# Altium PCB BEAGLEPLAYV020_220915.brd.PcbDoc (part 2 of 12)
Units mil, origin at the board's own origin, x right, y up, seen from the top; angles counter-clockwise.
Board outline 3149.7 x 3149.7 mil, 8 copper layers (TOP, LYR2_GND, LYR3, LAY4_PWR1, LAY5_PWR2, LAY6, LYR7_GND, BOTTOM), stack 60.84 mil thick; 782 components, 546 nets, 2864 pads, 2056 vias.
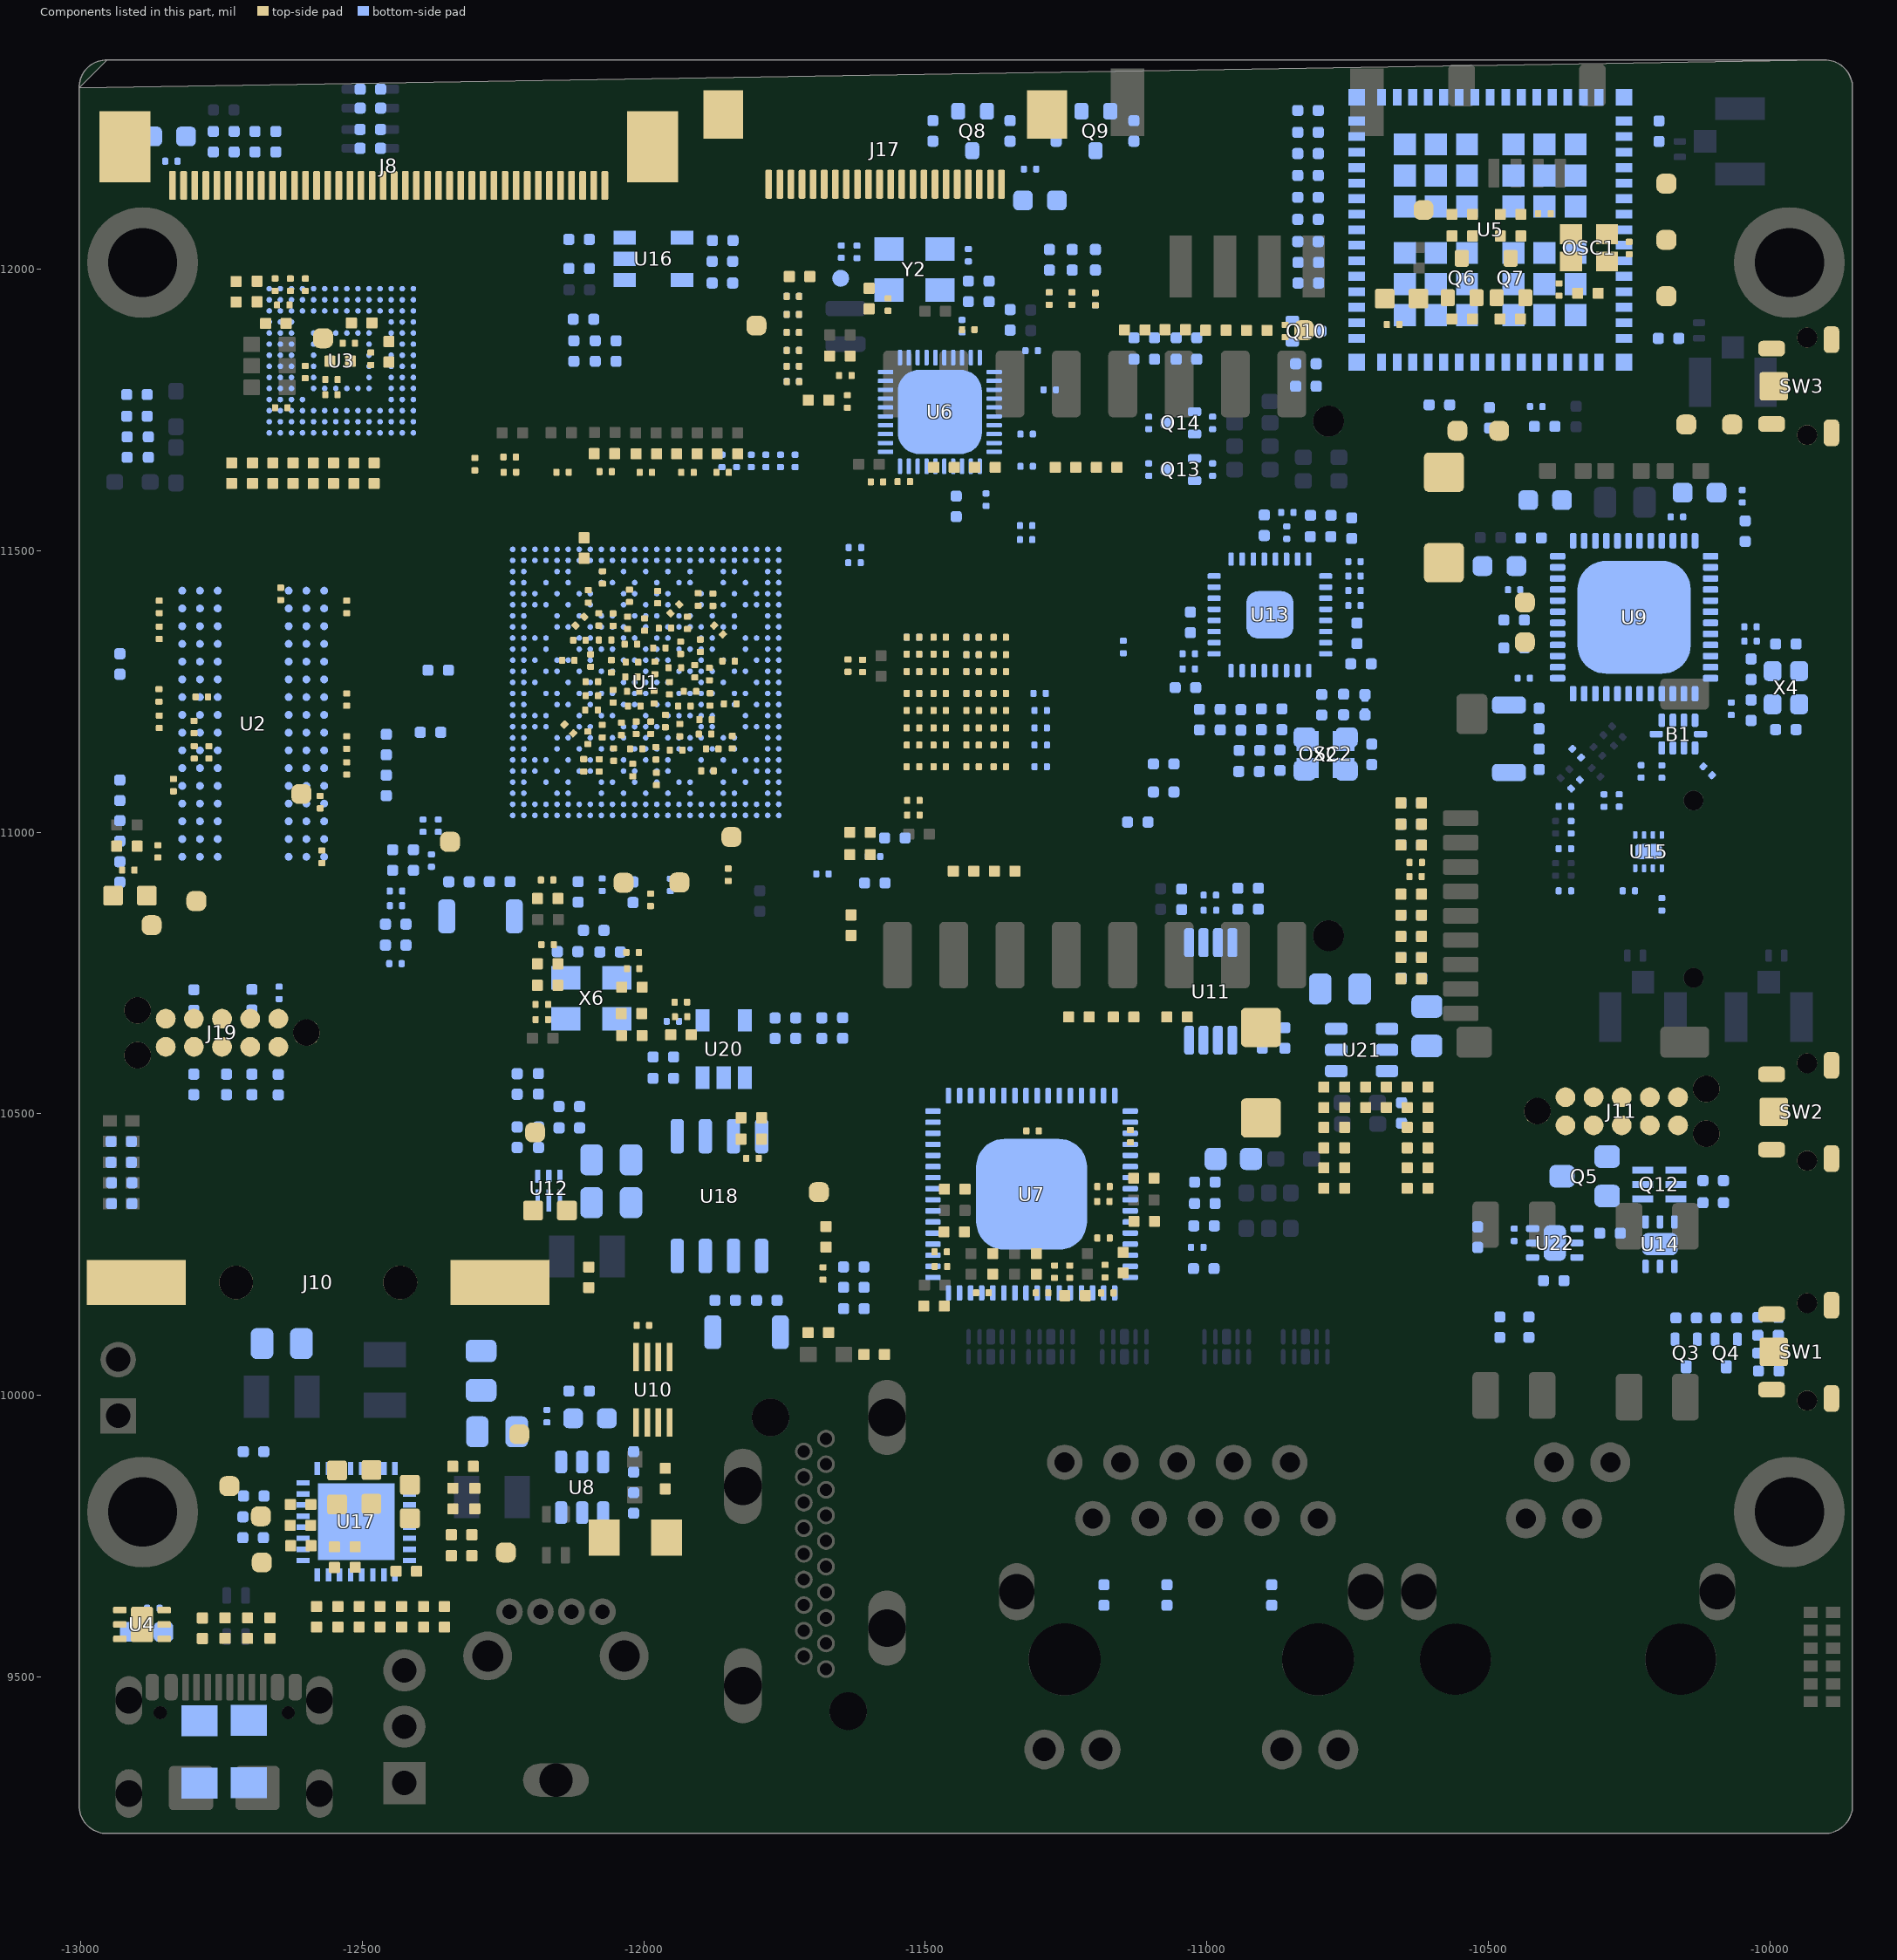
[diagram p8: the components of this part, seen from the top]

## Components (designator, comment, footprint, x,y, rotation, side; value= is the part's Value field where it differs from the comment) (continued)
OSC2 "OSC_4P_X4_SMD_2_5X2_0MM_DISCRETE_50MHZ" X4_SMD_2_5X2_0MM -10789,11141.5 r180 bottom
Q3 "NMOS_123_SOT_523_DISCRETE_DMG1012T-7" SOT_523#1 -10148.66,10075.28 r180 bottom
Q4 "NMOS_123_SOT_523_DISCRETE_DMG1012T-7" SOT_523#1 -10077.44,10075.28 r180 bottom
Q5 "PMOS_123_SOT23_DISCRETE_CJ3407" SOT23 -10331.5,10389.09 r90 bottom
Q6 "NMOS_123_SOT-323-3_DISCRETE_BSS138W" SOT-323-3#1 -10547.15,11984.2 r0 top
Q7 "NMOS_123_SOT-323-3_DISCRETE_BSS138W" SOT-323-3#1 -10460.5,11984.2 r0 top
Q8 "NMOS_123_SOT-323-3_DISCRETE_BSS138W" SOT-323-3#2 -11416.66,12245.34 r0 bottom
Q9 "NMOS_123_SOT-323-3_DISCRETE_BSS138W" SOT-323-3#2 -11197.66,12245.34 r0 bottom
Q10 "NMOS_123_SOT_523_DISCRETE_DMG1012T-7" SOT_523#2 -10823.7,11890 r90 bottom
Q12 "PNPX2_126_453_SMINI6-F3-B_DISCRETE_BCM857BS-7-F" SMINI6-F3-B -10196.54,10374.5 r270 bottom
Q13 "NMOS_123_SOT_523_DISCRETE_DMG1012T-7" SOT_523#2 -11046.15,11644 r270 bottom
Q14 "NMOS_123_SOT_523_DISCRETE_DMG1012T-7" SOT_523#2 -11046.15,11727 r270 bottom
R1 "R_R0402_DISCRETE_240R" R0402#1 -12930.44,11298.8 r270 bottom
R2 "R_R0201_DISCRETE_33R" R0201#1 -12772.3,11142 r90 top
R3 "R_R0201_DISCRETE_33R" R0201#1 -12798.3,11142 r90 top
R4 "R_R0402_DISCRETE_10K" R0402#1 -12930.44,10929.48 r270 bottom
R5 "R_R0402_DISCRETE_49.9K" R0402#2 -12478.86,11637.58 r90 top
R6 "R_R0402_DISCRETE_49.9K" R0402#2 -12514.86,11637.58 r90 top
R7 "R_R0402_DISCRETE_49.9K" R0402#2 -12586.86,11637.58 r90 top
R8 "R_R0402_DISCRETE_49.9K" R0402#2 -12694.86,11637.58 r90 top
R9 "R_R0402_DISCRETE_49.9K" R0402#2 -12731.86,11637.58 r90 top
R10 "R_R0402_DISCRETE_49.9K" R0402#2 -12550.86,11637.58 r90 top
R11 "R_R0402_DISCRETE_49.9K" R0402#2 -12622.86,11637.58 r90 top
R12 "R_R0402_DISCRETE_49.9K" R0402#2 -12658.86,11637.58 r90 top
R13 "R_R0402_DISCRETE_49.9K" R0402#2 -12724.14,11959.7 r270 top
R14 "R_R0402_DISCRETE_10K" R0402#2 -12653.36,11903.56 r0 top
R15 "R_R0402_DISCRETE_10K" R0402#2 -12539.12,11836.56 r0 top
R16 "R_R0201_DISCRETE_33R" R0201#1 -12300,11653.7 r90 top
R17 "R_R0402_DISCRETE_10K" R0402#3 -10819.79,11975.3 r180 bottom
R18 "R_R0402_DISCRETE_10K" R0402#3 -10820.3,12049 r180 bottom
R19 "R_R0402_DISCRETE_10K" R0402#3 -10587,11759 r180 bottom
R20 "R_R0402_DISCRETE_49.9K" R0402#2 -12500.96,11904.56 r0 top
R21 "R_R0402_DISCRETE_10K" R0402#3 -10636.42,10740.96 r0 bottom
R22 "R_R0402_DISCRETE_49.9K" R0402#3 -10820.3,12243.02 r180 bottom
R23 "R_R0402_DISCRETE_10K" R0402#3 -10820.3,12281.8 r0 bottom
R24 "R_R0402_DISCRETE_10K" R0402#3 -10820.3,12205.16 r0 bottom
R25 "R_R0402_DISCRETE_10K" R0402#3 -10820.3,12166.34 r0 bottom
R26 "R_R0402_DISCRETE_10K" R0402#3 -10820.3,12127.52 r0 bottom
R27 "R_R0402_DISCRETE_10K" R0402#3 -10820.3,12088.3 r0 bottom
R28 "R_R0402_DISCRETE_10K" R0402#1 -10498,11736 r90 bottom
R29 "R_R0402_DISCRETE_10K" R0402#3 -10824,11792 r180 bottom
R30 "R_R0402_DISCRETE_0R" R0402#2 -10323.2,11957 r180 top
R31 "R_R0201_DISCRETE_33R" R0201#1 -10374.5,11963.8 r270 top
R32 "R_R0402_DISCRETE_0R" R0402#2 -11723.21,11986.89 r0 top
R33 "R_R0402_DISCRETE_2.49K" R0402#1 -11349.33,11909.96 r270 bottom
R34 "R_R0402_DISCRETE_0R" R0402#1 -10884.86,9645.53 r90 bottom
R35 "R_R0402_DISCRETE_0R" R0402#1 -11279.5,12016.62 r270 bottom
R36 "R_R0201_DISCRETE_10K" R0201#2 -10989.85,11644 r90 bottom
R37 "R_R0201_DISCRETE_10K" R0201#2 -11103.15,11644 r90 bottom
R38 "R_R1206_DISCRETE_1M" R1206 -12788.86,9366.7 r90 bottom
R39 "R_R0402_DISCRETE_1K" R0402#1 -11182.7,9645.53 r90 bottom
R40 "R_R0402_DISCRETE_1K" R0402#1 -11239.13,12016.62 r270 bottom
R41 "R_R0201_DISCRETE_4.7K" R0201#3 -11735.14,11827.61 r0 bottom
R42 "R_R0201_DISCRETE_4.7K" R0201#1 -11735.14,11827.61 r180 top
R43 "R_R0201_DISCRETE_4.7K" R0201#3 -11735.14,11855.61 r0 bottom
R44 "R_R0201_DISCRETE_4.7K" R0201#1 -11735.14,11855.61 r180 top
R45 "R_R0201_DISCRETE_4.7K" R0201#3 -11735.14,11887.61 r0 bottom
R46 "R_R0201_DISCRETE_4.7K" R0201#1 -11735.14,11887.61 r180 top
R47 "R_R0201_DISCRETE_4.7K" R0201#3 -11735.14,11800.61 r0 bottom
R48 "R_R0201_DISCRETE_4.7K" R0201#1 -11735,11800 r180 top
R49 "R_R0201_DISCRETE_33R" R0201#2 -11809.14,11659.46 r270 bottom
R50 "R_R0201_DISCRETE_33R" R0201#2 -11783.14,11659.46 r270 bottom
R51 "R_R0201_DISCRETE_33R" R0201#2 -11757.14,11659.46 r270 bottom
R52 "R_R0201_DISCRETE_33R" R0201#2 -11731.14,11659.46 r270 bottom
R53 "R_R0402_DISCRETE_1K" R0402#3 -12900.08,11777.2 r0 bottom
R54 "R_R0402_DISCRETE_10K" R0402#2 -12468.5,9606.92 r90 top
R55 "R_R0402_DISCRETE_100K" R0402#2 -12505.5,9606.92 r270 top
R56 "R_R0402_DISCRETE_49.9K" R0402#3 -10100.74,10381.5 r0 bottom
R57 "R_R0201_DISCRETE_33R" R0201#2 -11861.14,11659.46 r270 bottom
R58 "R_R0201_DISCRETE_33R" R0201#2 -11835.14,11659.46 r270 bottom
R59 "R_R0402_DISCRETE_49.9K" R0402#3 -10100.74,10342.2 r0 bottom
R60 "R_R0402_DISCRETE_10K" R0402#1 -10654.2,10501.54 r90 bottom
R61 "R_R0201_DISCRETE_4.7K" R0201#3 -11735.14,11951.61 r0 bottom
R62 "R_R0201_DISCRETE_4.7K" R0201#1 -11735.14,11951.61 r180 top
R63 "R_R0402_DISCRETE_49.9K" R0402#2 -11690,10111.34 r180 top
R64 "R_R0402_DISCRETE_2.2K" R0402#3 -11003.6,10378.86 r180 bottom
R65 "R_R0402_DISCRETE_2.2K" R0402#3 -11003.64,10340.86 r180 bottom
R66 "R_R0402_DISCRETE_33K" R0402#3 -11005.48,10225.14 r0 bottom
R67 "R_R0402_DISCRETE_1K" R0402#3 -10926.62,10900.56 r180 bottom
R68 "R_R0402_DISCRETE_1K" R0402#1 -10861.44,10634.64 r270 bottom
R69 "R_R0201_DISCRETE_33R" R0201#3 -11295,11216.26 r0 bottom
R70 "R_R0402_DISCRETE_10K" R0402#2 -11961.86,9852.2 r90 top
R71 "R_R0201_DISCRETE_33R" R0201#2 -11148.44,11329 r90 bottom
R72 "R_R0201_DISCRETE_33R" R0201#3 -11295,11154.86 r0 bottom
R73 "R_R0402_DISCRETE_10K" R0402#3 -10637,10777.74 r0 bottom
R74 "R_R0402_DISCRETE_10K" R0402#3 -10637,10815.04 r0 bottom
R75 "R_R0402_DISCRETE_10K" R0402#3 -10637,10852.76 r0 bottom
R76 "R_R0402_DISCRETE_10K" R0402#3 -10637,11014.28 r0 bottom
R77 "R_R0402_DISCRETE_10K" R0402#3 -10637,11052.04 r0 bottom
R78 "R_R0402_DISCRETE_10K" R0402#3 -10637,10977.14 r0 bottom
R79 "R_R0201_DISCRETE_33R" R0201#3 -11591,10956.95 r0 bottom
R80 "R_R0201_DISCRETE_33R" R0201#3 -11682.7,10926 r0 bottom
R81 "R_R0402_DISCRETE_1K" R0402#1 -12930.44,11074.6 r90 bottom
R82 "R_R0402_DISCRETE_10K" R0402#1 -12457.16,11083.2 r90 bottom
R83 "R_R0402_DISCRETE_1K" R0402#1 -12930.44,11002.56 r90 bottom
R84 "R_R0402_DISCRETE_2.2K" R0402#1 -12457.16,11155.72 r90 bottom
R85 "R_R0402_DISCRETE_2.2K" R0402#3 -12378.72,11177.56 r180 bottom
R86 "R_R0402_DISCRETE_1K" R0402#3 -12440.48,10799.56 r180 bottom
R87 "R_R0402_DISCRETE_1K" R0402#3 -12440.48,10836.84 r0 bottom
R88 "R_R0402_DISCRETE_240R" R0402#3 -12365.16,11287.84 r0 bottom
R89 "R_R0402_DISCRETE_5.6K" R0402#2 -11234,10177 r180 top
R90 "R_R0201_DISCRETE_10K" R0201#1 -11521.9,11346.3 r0 top
R91 "R_R0201_DISCRETE_10K" R0201#1 -11474.4,11346.3 r0 top
R92 "R_R0201_DISCRETE_10K" R0201#1 -11415.96,11346.1 r0 top
R93 "R_R0201_DISCRETE_10K" R0201#1 -11367.7,11346.1 r0 top
R94 "R_R0402_DISCRETE_10K" R0402#3 -12107,11911 r0 bottom
R95 "R_R0201_DISCRETE_33R" R0201#3 -11624.92,11505.56 r180 bottom
R96 "R_R0201_DISCRETE_33R" R0201#3 -11321,11544.56 r180 bottom
R97 "R_R0201_DISCRETE_33R" R0201#3 -11321,11519.56 r180 bottom
R98 "R_R0201_DISCRETE_33R" R0201#2 -10858.14,11532.04 r270 bottom
R99 "R_R0402_DISCRETE_0R" R0402#1 -10795.86,11226.4 r90 bottom
R100 "R_R0402_DISCRETE_49.9R" R0402#2 -10755.14,10529.44 r270 top
R101 "R_R0402_DISCRETE_49.9R" R0402#2 -10792.14,10529.32 r270 top
R102 "R_R0402_DISCRETE_2K" R0402#2 -10607.14,10529.44 r270 top
R103 "R_R0402_DISCRETE_2K" R0402#2 -10644.14,10529.44 r270 top
R104 "R_R0402_DISCRETE_0R" R0402#2 -10717.86,10529.44 r90 top
R105 "R_R0402_DISCRETE_0R" R0402#2 -10681.14,10529.44 r270 top
R106 "R_R0402_DISCRETE_0R" R0402#2 -10755.14,10386.12 r270 top
R107 "R_R0402_DISCRETE_0R" R0402#2 -10792.14,10386.12 r270 top
R108 "R_R0402_DISCRETE_0R" R0402#2 -10644.14,10386.12 r270 top
R109 "R_R0402_DISCRETE_0R" R0402#2 -10607.14,10386.12 r270 top
R110 "R_R0402_DISCRETE_2.2K" R0402#1 -11029.14,11372.64 r270 bottom
R111 "R_R0402_DISCRETE_2.2K" R0402#3 -10797.68,11562.86 r180 bottom
R112 "R_R0402_DISCRETE_2.2K" R0402#3 -10726.28,11299.14 r0 bottom
R113 "R_R0402_DISCRETE_2.2K" R0402#1 -10898,11545.21 r270 bottom
R114 "R_R0402_DISCRETE_2.2K" R0402#1 -11013.14,11200.2 r90 bottom
R115 "R_R0402_DISCRETE_2.2K" R0402#1 -10976.14,11200.16 r90 bottom
R116 "R_R0402_DISCRETE_2.2K" R0402#3 -10798,11525 r0 bottom
R117 "R_R0402_DISCRETE_100K" R0402#1 -10043.84,11534.68 r270 bottom
R118 "R_R0402_DISCRETE_1M" R0402#1 -10033.44,11289.54 r270 bottom
R119 "R_R0402_DISCRETE_0R" R0402#1 -10033.44,11216.78 r90 bottom
R120 "R_R0402_DISCRETE_0R" R0402#3 -10454.22,11327.28 r0 bottom
R121 "R_R0402_DISCRETE_0R" R0402#3 -10454.26,11376.84 r0 bottom
R122 "R_R0402_DISCRETE_10K" R0402#2 -11616,10960.21 r180 top
R123 "R_R0402_DISCRETE_0R" R0402#2 -12300,9817 r90 top
R124 "R_R0402_DISCRETE_15K" R0402#2 -12339,9817 r270 top
R125 "R_R0402_DISCRETE_10K" R0402#3 -11036.21,11878 r0 bottom
R126 "R_R0402_DISCRETE_10K" R0402#1 -12019.14,10893.58 r270 bottom
R127 "R_R0402_DISCRETE_0R" R0402#3 -12088.92,10825.84 r0 bottom
R128 "R_R0402_DISCRETE_5.1K" R0402#2 -12663.86,9586.92 r90 top
R129 "R_R0402_DISCRETE_5.1K" R0402#2 -12783.86,9586.52 r90 top
R130 "R_R0402_DISCRETE_499R" R0402#2 -12106,11504.7 r90 top
R131 "R_R0402_DISCRETE_499R" R0402#1 -12124.14,11854.62 r270 bottom
R132 "R_R0402_DISCRETE_20K" R0402#1 -12049.14,11854.62 r270 bottom
R133 "R_R0402_DISCRETE_1K" R0402#3 -12114.8,10007.86 r180 bottom
R134 "R_R0402_DISCRETE_10K" R0402#1 -11646.84,10652.54 r270 bottom
R135 "R_R0402_DISCRETE_0R" R0402#3 -11122.64,11018.04 r0 bottom
R136 "R_R0402_DISCRETE_20K" R0402#1 -12018,9809 r90 bottom
R137 "R_R0402_DISCRETE_10K" R0402#1 -12224.86,10458.44 r90 bottom
R138 "R_R0402_DISCRETE_10K" R0402#1 -12186.86,10458.4 r90 bottom
R139 "R_R0402_DISCRETE_100K" R0402#1 -12187.14,10553.3 r270 bottom
R140 "R_R0402_DISCRETE_10K" R0402#2 -10911.38,11891.44 r180 top
R141 "R_R0402_DISCRETE_11K" R0402#1 -12224.86,10553.02 r90 bottom
R142 "R_R0402_DISCRETE_10K" R0402#2 -11127.98,11892.16 r0 top
R143 "R_R0402_DISCRETE_10K" R0402#3 -11965.24,10563.14 r0 bottom
R144 "R_R0402_DISCRETE_10K" R0402#3 -11965.2,10601.14 r0 bottom
R145 "R_R0201_DISCRETE_33R" R0201#3 -11625.76,11478.56 r180 bottom
R146 "R_R0402_DISCRETE_10K" R0402#3 -11627.08,10228.14 r0 bottom
R147 "R_R0402_DISCRETE_10K" R0402#3 -11626.96,10191.86 r180 bottom
R148 "R_R0402_DISCRETE_10K" R0402#1 -11683.84,10652.22 r270 bottom
R149 "R_R0402_DISCRETE_0R" R0402#2 -11616,10999.95 r0 top
R150 "R_R0402_DISCRETE_10K" R0402#3 -11005,10301 r180 bottom
R151 "R_R0402_DISCRETE_10K" R0402#1 -12741.14,10552.24 r270 bottom
R152 "R_R0402_DISCRETE_10K" R0402#1 -12018,9882 r270 bottom
R153 "R_R0402_DISCRETE_499R" R0402#1 -12086.14,11854.62 r270 bottom
R154 "R_R0402_DISCRETE_10K" R0402#1 -12798.86,10702.22 r90 bottom
R155 "R_R0402_DISCRETE_10K" R0402#1 -12695.86,10702.58 r90 bottom
R156 "R_R0402_DISCRETE_10K" R0402#1 -12649.14,10551.76 r270 bottom
R157 "R_R0402_DISCRETE_10K" R0402#1 -12799.14,10552.24 r270 bottom
R158 "R_R0402_DISCRETE_10K" R0402#1 -12695.86,10552.24 r90 bottom
R159 "R_R0402_DISCRETE_10K" R0402#2 -12609,9733 r180 top
R160 "R_R0402_DISCRETE_10K" R0402#2 -12430,9607 r90 top
R161 "R_R0402_DISCRETE_10K" R0402#3 -12693,9900 r0 bottom
R162 "R_R0402_DISCRETE_10K" R0402#2 -11809,10455 r180 top
R163 "R_R0402_DISCRETE_0R" R0402#2 -11809,10493 r180 top
R164 "R_R0402_DISCRETE_1K" R0402#1 -11070.86,9645.53 r90 bottom
R165 "R_R0402_DISCRETE_1K" R0402#1 -11197.93,12016.62 r270 bottom
R166 "R_R0402_DISCRETE_2.2K" R0402#3 -10148.66,10137.61 r180 bottom
R167 "R_R0402_DISCRETE_2.2K" R0402#3 -10077.44,10137.61 r180 bottom
R168 "R_R0402_DISCRETE_10K" R0402#1 -12879.84,11683.92 r270 bottom
R169 "R_R0402_DISCRETE_10K" R0402#1 -11267.56,12245.34 r90 bottom
R170 "R_R0201_DISCRETE_10K" R0201#1 -11415.96,11315.3 r0 top
R171 "R_R0201_DISCRETE_10K" R0201#1 -11521.9,11316.3 r0 top
R172 "R_R0201_DISCRETE_10K" R0201#1 -11521.9,11285.3 r0 top
R173 "R_R0201_DISCRETE_10K" R0201#1 -11415.96,11285.3 r0 top
R174 "R_R0201_DISCRETE_10K" R0201#1 -11521.9,11246.64 r0 top
R175 "R_R0201_DISCRETE_10K" R0201#1 -11415.96,11246.64 r0 top
R176 "R_R0201_DISCRETE_10K" R0201#1 -11521.9,11185.26 r0 top
R177 "R_R0201_DISCRETE_10K" R0201#1 -11521.9,11154.86 r0 top
R178 "R_R0201_DISCRETE_10K" R0201#1 -11521.9,11216.26 r0 top
R179 "R_R0201_DISCRETE_10K" R0201#1 -11415.96,11216.26 r0 top
R180 "R_R0201_DISCRETE_10K" R0201#1 -11415.96,11154.86 r0 top
R181 "R_R0201_DISCRETE_10K" R0201#1 -11415.96,11185.26 r0 top
R182 "R_R0201_DISCRETE_10K" R0201#1 -11521.9,11116.36 r0 top
R183 "R_R0201_DISCRETE_10K" R0201#1 -11415.96,11116.36 r0 top
R184 "R_R0402_DISCRETE_1K" R0402#1 -12917.56,11683.92 r90 bottom
R185 "R_R0402_DISCRETE_1K" R0402#3 -12900.08,11738.84 r0 bottom
R186 "R_R0402_DISCRETE_10K" R0402#2 -10546.34,11911.56 r0 top
R187 "R_R0201_DISCRETE_10K" R0201#1 -11367.7,11315.3 r0 top
R188 "R_R0201_DISCRETE_10K" R0201#1 -11474.4,11316.3 r0 top
R189 "R_R0201_DISCRETE_10K" R0201#1 -11474.4,11285.3 r0 top
R190 "R_R0201_DISCRETE_10K" R0201#1 -11367.7,11285.3 r0 top
R191 "R_R0201_DISCRETE_10K" R0201#1 -11474.4,11246.64 r0 top
R192 "R_R0201_DISCRETE_10K" R0201#1 -11367.7,11246.64 r0 top
R193 "R_R0201_DISCRETE_10K" R0201#1 -11474.4,11185.26 r0 top
R194 "R_R0201_DISCRETE_10K" R0201#1 -11474.4,11154.86 r0 top
R195 "R_R0201_DISCRETE_10K" R0201#1 -11474.4,11216.26 r0 top
R196 "R_R0201_DISCRETE_10K" R0201#1 -11367.7,11216.26 r0 top
R197 "R_R0201_DISCRETE_10K" R0201#1 -11367.7,11154.86 r0 top
R198 "R_R0201_DISCRETE_10K" R0201#1 -11367.7,11185.26 r0 top
R199 "R_R0201_DISCRETE_10K" R0201#1 -11474.4,11116.36 r0 top
R200 "R_R0201_DISCRETE_10K" R0201#1 -11367.7,11116.36 r0 top
R201 "R_R0402_DISCRETE_1K" R0402#3 -11554,10989.95 r0 bottom
R202 "R_R0402_DISCRETE_1K" R0402#3 -12928.04,10450.86 r180 bottom
R203 "R_R0402_DISCRETE_1K" R0402#3 -12928.08,10413.86 r180 bottom
R204 "R_R0402_DISCRETE_1K" R0402#3 -12927.12,10377.56 r180 bottom
R205 "R_R0402_DISCRETE_1K" R0402#3 -12927.16,10340.56 r180 bottom
R206 "R_R0402_DISCRETE_1K" R0402#3 -10002.21,10043.5 r0 bottom
R207 "R_R0402_DISCRETE_10K" R0402#3 -10384,10203.84 r0 bottom
R208 "R_R0402_DISCRETE_10K" R0402#3 -11111.21,11878 r180 bottom
R209 "R_R0402_DISCRETE_10K" R0402#1 -11730.14,10652.2 r270 bottom
R210 "R_R0402_DISCRETE_10K" R0402#3 -12114.94,12052.84 r0 bottom
R211 "R_R0402_DISCRETE_100K" R0402#3 -11860.36,12013.84 r0 bottom
R212 "R_R0402_DISCRETE_120K" R0402#3 -11859.76,12050.84 r0 bottom
R213 "R_R0402_DISCRETE_10K" R0402#1 -11766.86,10652 r90 bottom
R214 "R_R0402_DISCRETE_10K" R0402#2 -12543.14,9606.92 r270 top
R215 "R_R0402_DISCRETE_10K" R0402#2 -12581.14,9606.88 r270 top
R216 "R_R0201_DISCRETE_33R" R0201#3 -11415.96,11285.3 r180 bottom
R217 "R_R0201_DISCRETE_33R" R0201#2 -12073.86,10906.82 r90 bottom
R218 "R_R0402_DISCRETE_10K" R0402#3 -10819.79,12011.94 r180 bottom
R219 "R_R0402_DISCRETE_0R" R0402#3 -12485.62,12214.57 r180 bottom
R220 "R_R0402_DISCRETE_0R" R0402#1 -10719.14,11226.32 r270 bottom
R221 "R_R0402_DISCRETE_0R" R0402#1 -10757.14,11226.9 r270 bottom
R222 "R_R0402_DISCRETE_0R" R0402#1 -10707.14,11138.4 r270 bottom
R223 "R_R0402_DISCRETE_0R" R0402#1 -10939.5,11199.56 r90 bottom
R224 "R_R0402_DISCRETE_33R" R0402#3 -10885.08,11182.14 r0 bottom
R225 "R_R0402_DISCRETE_0R" R0402#3 -12485.62,12248.03 r180 bottom
R226 "R_R0402_DISCRETE_10K" R0402#2 -10461.1,11911.56 r0 top
R227 "R_R0402_DISCRETE_0R" R0402#1 -12116.5,10894.06 r90 bottom
R228 "R_R0402_DISCRETE_10K" R0402#2 -12321,9874 r180 top
R229 "R_R0402_DISCRETE_0R" R0402#1 -11386.73,11960.38 r270 bottom
R230 "R_R0201_DISCRETE_33R" R0201#3 -11415.96,11346.1 r180 bottom
R231 "R_R0402_DISCRETE_0R" R0402#3 -10924.44,11145.5 r180 bottom
R232 "R_R0402_DISCRETE_10K" R0402#1 -11349.5,12245.34 r270 bottom
R233 "R_R0402_DISCRETE_10K" R0402#1 -11129.5,12245.34 r270 bottom
R234 "R_R0402_DISCRETE_10K" R0402#3 -11076.64,11071.5 r180 bottom
R235 "R_R0402_DISCRETE_10K" R0402#3 -11076.64,11121.36 r180 bottom
R236 "R_R0402_DISCRETE_1K" R0402#3 -10003.21,10075.14 r0 bottom
R237 "R_R0402_DISCRETE_1K" R0402#3 -10003.21,10106.78 r0 bottom
R238 "R_R0402_DISCRETE_1K" R0402#3 -10003.21,10138.42 r0 bottom
R239 "R_R0402_DISCRETE_2.2K" R0402#3 -10824,11832 r180 bottom
R240 "R_R0402_DISCRETE_10K" R0402#1 -12690.5,12226.34 r270 bottom
R241 "R_R0402_DISCRETE_10K" R0402#1 -12653.5,12226.34 r270 bottom
R242 "R_R0402_DISCRETE_10K" R0402#1 -12727.5,12226.34 r270 bottom
R243 "R_R0402_DISCRETE_10K" R0402#1 -12764.5,12226.34 r270 bottom
R244 "R_R0201_DISCRETE_33R" R0201#2 -11952.8,10906.64 r270 bottom
R245 "R_R0201_DISCRETE_33R" R0201#3 -11295,11185.26 r0 bottom
R246 "R_R0201_DISCRETE_33R" R0201#3 -11297,11246.64 r0 bottom
R247 "R_R0201_DISCRETE_33R" R0201#3 -11295,11116.36 r0 bottom
R248 "R_R0402_DISCRETE_0R" R0402#1 -11423.53,11960.62 r90 bottom
R249 "R_R0201_DISCRETE_4.7K" R0201#3 -11735.14,11919.61 r0 bottom
R250 "R_R0402_DISCRETE_10K" R0402#1 -11486.5,12245.34 r90 bottom
R251 "R_R0402_DISCRETE_10K" R0402#3 -11589.7,10910 r0 bottom
R252 "R_R0201_DISCRETE_4.7K" R0201#1 -11735.14,11919.61 r180 top
R253 "R_R0201_DISCRETE_4.7K" R0201#2 -11280,11947.81 r270 bottom
R254 "R_R0402_DISCRETE_10K" R0402#2 -10460.5,12058.86 r0 top
R255 "R_R0402_DISCRETE_10K" R0402#2 -10546.34,12058.86 r180 top
R256 "R_R0402_DISCRETE_10K" R0402#3 -11626.76,10154 r180 bottom
R257 "R_R0402_DISCRETE_2.2K" R0402#2 -11111.2,10309 r180 top
R258 "R_R0201_DISCRETE_33R" R0201#1 -11176.7,10182 r180 top
R259 "R_R0201_DISCRETE_10K" R0201#2 -10989.85,11727 r90 bottom
R260 "R_R0402_DISCRETE_560K" R0402#3 -12132.17,10475 r0 bottom
R261 "R_R0402_DISCRETE_124K" R0402#3 -12132.21,10513 r0 bottom
R262 "R_R0201_DISCRETE_10K" R0201#2 -11103.15,11727 r270 bottom
R263 "R_R0402_DISCRETE_2.2K" R0402#1 -11445,11578.75 r270 bottom
R264 "R_R0402_DISCRETE_0R" R0402#3 -12485.46,12319.44 r180 bottom
R265 "R_R0402_DISCRETE_0R" R0402#3 -12485.46,12285.98 r180 bottom
R266 "R_R0201_DISCRETE_33R" R0201#3 -11521.9,11285.3 r180 bottom
R267 "R_R0201_DISCRETE_33R" R0201#3 -11521.9,11316.3 r180 bottom
R268 "R_R0201_DISCRETE_33R" R0201#3 -11415.96,11315.3 r180 bottom
R269 "R_R0201_DISCRETE_33R" R0201#3 -11521.9,11346.3 r180 bottom
R270 "R_R0201_DISCRETE_33R" R0201#3 -11521.9,11246.64 r180 bottom
R271 "R_R0201_DISCRETE_33R" R0201#3 -11415.96,11246.64 r180 bottom
R272 "R_R0402_DISCRETE_12K" R0402#3 -10925,11108 r180 bottom
R273 "R_R0201_DISCRETE_33R" R0201#1 -11850.05,10924.58 r270 top
R274 "R_R0201_DISCRETE_33R" R0201#1 -11988,10880 r270 top
R275 "R_R0402_DISCRETE_10K" R0402#1 -10870.08,11128 r90 bottom
R276 "R_R0402_DISCRETE_390K" R0402#3 -10284,10288 r0 bottom
R277 "R_R0201_DISCRETE_0R" R0201#2 -11649,12031 r90 bottom
R278 "R_R0402_DISCRETE_100K" R0402#1 -10519,10281 r270 bottom
R283 "R_R0201_DISCRETE_4.7K" R0201#1 -11280,11947.81 r270 top
R308 "R_R0201_DISCRETE_4.7K" R0201#2 -11239.6,11947.81 r270 bottom
R309 "R_R0201_DISCRETE_4.7K" R0201#1 -11239.6,11947.81 r270 top
R310 "R_R0201_DISCRETE_4.7K" R0201#2 -11198,11946.81 r270 bottom
R311 "R_R0201_DISCRETE_4.7K" R0201#1 -11198,11946.81 r270 top
SW1 "TACTILE SWITCH_2+3P_BUTTON2_3P_4D55X2D3X1D88MM_DISCRETE_TS23M-BN-PT-PF" BUTTON2_3P_4D55X2D3X1D88MM -9929,10077.3 r270 top
SW2 "TACTILE SWITCH_2+3P_BUTTON2_3P_4D55X2D3X1D88MM_DISCRETE_TS23M-BN-PT-PF" BUTTON2_3P_4D55X2D3X1D88MM -9929,10503.3 r270 top
SW3 "TACTILE SWITCH_2+3P_BUTTON2_3P_4D55X2D3X1D88MM_DISCRETE_TS23M-BN-PT-PF" BUTTON2_3P_4D55X2D3X1D88MM -9929,11792 r270 top
TP1 "TEST POINT_TP35S_SMD_DISCRETE_TEST POINT" TP35S_SMD -12569.51,11877.14 r270 top
TP2 "TEST POINT_TP35S_SMD_DISCRETE_TEST POINT" TP35S_SMD -11844.21,10991.58 r90 top
TP3 "TEST POINT_TP35S_SMD_DISCRETE_TEST POINT" TP35S_SMD -12035.77,10910.39 r270 top
TP4 "TEST POINT_TP35S_SMD_DISCRETE_TEST POINT" TP35S_SMD -10555,11713 r180 top
TP5 "TEST POINT_TP35S_SMD_DISCRETE_TEST POINT" TP35S_SMD -10481,11713 r180 top
TP6 "TEST POINT_TP35S_SMD_DISCRETE_TEST POINT" TP35S_SMD -10615,12105 r0 top
TP7 "TEST POINT_TP35S_SMD_DISCRETE_TEST POINT" TP35S_SMD -10183.83,12151.89 r0 top
TP8 "TEST POINT_TP30C_SMD_DISCRETE_TEST POINT" TP30C_SMD -11650.32,11983.65 r180 bottom
TP9 "TEST POINT_TP35S_SMD_DISCRETE_TEST POINT" TP35S_SMD -10183.83,11951.89 r0 top
TP10 "TEST POINT_TP35S_SMD_DISCRETE_TEST POINT" TP35S_SMD -10183.83,12051.89 r0 top
TP11 "TEST POINT_TP35S_SMD_DISCRETE_TEST POINT" TP35S_SMD -12794.55,10877.84 r90 top
TP12 "TEST POINT_TP35S_SMD_DISCRETE_TEST POINT" TP35S_SMD -10435.19,11337.51 r90 top
TP13 "TEST POINT_TP35S_SMD_DISCRETE_TEST POINT" TP35S_SMD -12608,11068 r90 top
TP14 "TEST POINT_TP35S_SMD_DISCRETE_TEST POINT" TP35S_SMD -10435.19,11408.07 r270 top
TP15 "TEST POINT_TP35S_SMD_DISCRETE_TEST POINT" TP35S_SMD -12344,10983 r90 top
TP16 "TEST POINT_TP35S_SMD_DISCRETE_TEST POINT" TP35S_SMD -11936.55,10910.95 r90 top
TP17 "TEST POINT_TP35S_SMD_DISCRETE_TEST POINT" TP35S_SMD -10067.19,11724.11 r180 top
TP18 "TEST POINT_TP35S_SMD_DISCRETE_TEST POINT" TP35S_SMD -12221,9931 r90 top
TP19 "TEST POINT_TP35S_SMD_DISCRETE_TEST POINT" TP35S_SMD -12193,10467 r270 top
TP20 "TEST POINT_TP35S_SMD_DISCRETE_TEST POINT" TP35S_SMD -11689,10361 r0 top
TP21 "TEST POINT_TP35S_SMD_DISCRETE_TEST POINT" TP35S_SMD -12874,10835 r90 top
TP22 "TEST POINT_TP35S_SMD_DISCRETE_TEST POINT" TP35S_SMD -12245,9721 r90 top
TP23 "TEST POINT_TP35S_SMD_DISCRETE_TEST POINT" TP35S_SMD -12678.34,9703.31 r90 top
TP24 "TEST POINT_TP35S_SMD_DISCRETE_TEST POINT" TP35S_SMD -12679.97,9785.31 r90 top
TP25 "TEST POINT_TP35S_SMD_DISCRETE_TEST POINT" TP35S_SMD -12736,9839 r90 top
TP26 "TEST POINT_TP35S_SMD_DISCRETE_TEST POINT" TP35S_SMD -10827.21,11891.69 r0 top
TP27 "TEST POINT_TP35S_SMD_DISCRETE_TEST POINT" TP35S_SMD -11799.82,11899.69 r0 top
TP28 "TEST POINT_TP35S_SMD_DISCRETE_TEST POINT" TP35S_SMD -10148.56,11724.11 r180 top
U1 "AM62X_BGA425_BGA425_0D5_13X13MM_IC_AM62X" BGA425_0D5_13X13MM -11996.5,11266.2 r0 bottom
U2 "DDR4_FBGA96_BGA96_T9_P8_10_3X13_3_IC_16GBIT" BGA96_T9_P8_10_3X13_3 -12693.66,11193.2 r180 bottom
U3 "EMMC_1_BGA153_P14_P5_11P5X13_IC_(S1+S2)_EMMC16G-TB29-PZ90" BGA153_P14_P5_11P5X13 -12537.12,11837.29 r0 bottom
U4 "TVS0500DRVR_WSON6_0D65_2X2X0_8MM_DISCRETE_TVS0500DRVR" WSON6_0D65_2X2X0_8MM#1 -12891.14,9593.16 r0 top
U5 "WL1807MOD_E-13_4X13_3-N100_0_75-TOP_IC_WL1807MODGIMOC" E-13_4X13_3-N100_0_75-TOP -10496.64,12070 r0 bottom
U6 "RTL8211_QFN40_0D4_5X5MM_IC_RTL8211F-VD-CG" QFN40_0D4_5X5MM -11474.13,11746.42 r180 bottom
U7 "IT66121_QFN64_QFN64_0D5_9X9MM_IC_IT66121FN" QFN64_0D5_9X9MM -11311.23,10357.2 r180 bottom
U8 "TPD3S014D_SOT23-6_SOT23_6_IC_TPD3S014DBVR" SOT23_6#1 -12109.5,9836.87 r0 bottom
U9 "CC1352P1F3RGZ_QFN48_0D5_7X7MM_IC_CC1352P7" QFN48_0D5_7X7MM -10241.22,11381.78 r270 bottom
U10 "SN74LVC2G241_U_8_DCU_IC_SN74LVC2G241DCUR" U_8_DCU -11983.88,10010.16 r0 top
U11 "ADC102S051_VSSOP8_0D65_3X3X1_1MM_IC_ADC102S051" VSSOP8_0D65_3X3X1_1MM -10993.03,10717.37 r0 bottom
U12 "TLV62595DMQR_VSON6_0D5_1D5X1D5X1MM_IC_TLV62595DMQR" VSON6_0D5_1D5X1D5X1MM -12176.88,10368.5 r90 bottom
U13 "DP83TD510E_VQFN32_0D5_5X5MM_IC_DP83TD510ERHBR" VQFN32_0D5_5X5MM -10888,11386 r90 bottom
U14 "TVS0500DRVR_WSON6_0D65_2X2X0_8MM_DISCRETE_TVS0500DRVR" WSON6_0D65_2X2X0_8MM#2 -10195.27,10268.56 r270 bottom
U15 "SKY13317-373LF_SON8P_150X150X50MM_IC_SKY13317-373LF" SON8P_150X150X50MM -10215.24,10966.2 r180 bottom
U16 "LDO_5P_FB_EN_SOT23-5_IC_TLV75801PDBVR" SOT23-5#1 -11982.84,12018.36 r270 bottom
U17 "TPS65219_QFN32_5X5MM_TPS65219_IC_TPS65219" QFN32_5X5MM_TPS65219 -12510.69,9775.8 r180 bottom
U18 "DS1339_8P_SOIC8_1D27_4_9X3_9MM_IC_BQ32002" SOIC8_1D27_4_9X3_9MM -11865.66,10353.86 r180 bottom
U20 "MEM_24LC32_SOT23-5_SOT23-5_IC_FT24C32A-ELRT" SOT23-5#2 -11857.97,10614.94 r180 bottom
U21 "TPS22918DBV_SOT23_6_IC_TPS22918DBVR" SOT23_6#2 -10725.17,10613.5 r90 bottom
U22 "TPS25200DRV_WSON6_0D65_2X2X0_8MM_IC_TPS25200DRVT" WSON6_0D65_2X2X0_8MM#3 -10382,10270.56 r180 bottom
X2 "XTAL_4P_X4-SMD-2_5X2_0X1_0MM_DISCRETE_25MHZ" X4-SMD-2_5X2_0X1_0MM -10789.16,11137.96 r180 bottom
X3 "XTAL_2P_X2_SMD_3_2X1_5MM_DISCRETE_32.768KHZ" X2_SMD_3_2X1_5MM#1 -10463.47,11166.13 r270 bottom
X4 "XTAL_4P_X4_SMD_2_0X1_6MM_DISCRETE_48MHZ" X4_SMD_2_0X1_6MM -9971.62,11256.74 r270 bottom
X5 "XTAL_2P_X2_SMD_3_2X1_5MM_DISCRETE_32.768KHZ" X2_SMD_3_2X1_5MM#2 -12290,10850.7 r180 bottom
X6 "XTAL_4P_X4-SMD-3_2X2_5X1_0MM_DISCRETE_25MHZ" X4-SMD-3_2X2_5X1_0MM -12092.94,10705.28 r180 bottom
X7 "XTAL_2P_X2_SMD_3_2X1_5MM_DISCRETE_32.768KHZ" X2_SMD_3_2X1_5MM#2 -11817.45,10112.17 r0 bottom
Y2 "XTAL_4P_2_X4-SMD-3_2X2_5X1_0MM_DISCRETE_25MHZ" X4-SMD-3_2X2_5X1_0MM -11519.38,11999.33 r0 bottom

## Footprints (in the part's own frame and the unit in brackets; to place one, negate y for a bottom-side part, rotate by r counter-clockwise, add the part's x,y. Pads: shape width x height; smd on the part's side, far side on the other; paste and mask are expansions set on the pad)
BAT-CR1220 [mil] "BAT-CR1220"
  rect 80x176 smd: 1(0,322.83) 2(0,-322.83)
  round 60 hole 60 unplated: ""(0,145.67) ""(0,-145.67)
  TOP keep-out region: -39.37,-232.28 -39.37,-409.45 39.37,-409.45 39.37,-232.28
  TOP keep-out region: -39.37,413.39 -39.37,236.22 39.37,236.22 39.37,413.39
  Multi-Layer keep-out region: 0,-193.32 12.33,-191.69 23.82,-186.93 33.69,-179.36 41.26,-169.49 46.02,-158 47.65,-145.67 46.02,-133.34 41.26,-121.85 41.26,-121.85 33.69,-111.98 23.82,-104.4 12.33,-99.64 0,-98.02 -12.33,-99.64 -23.82,-104.4 -33.69,-111.98 -41.26,-121.85 -41.26,-121.85 -46.02,-133.34 -47.65,-145.67 -46.02,-158 -41.26,-169.49 -33.69,-179.36 -23.82,-186.93 -12.33,-191.69 0,-193.32
  Multi-Layer keep-out region: 0,98.02 12.33,99.65 23.82,104.41 33.69,111.98 41.26,121.85 46.02,133.34 47.65,145.67 46.02,158 41.26,169.49 41.26,169.49 33.69,179.36 23.82,186.93 12.33,191.69 0,193.32 -12.33,191.69 -23.82,186.93 -33.69,179.36 -41.26,169.49 -41.26,169.49 -46.02,158 -47.65,145.67 -46.02,133.34 -41.26,121.85 -33.69,111.98 -23.82,104.41 -12.33,99.65 0,98.02
  silkscreen extent -291,-311 291,288, body extent -335,-421 335,421, height 150
BF10_0D5_2X1D25X1MM [mm] "BF10_0D5_2X1D25X1MM"
  rrect50% 0.6x0.3 smd: 1(0.625,-0.75) 2(0.625,-0.25) 3(0.625,0.25) 4(0.625,0.75) 6(-0.625,0.75) 7(-0.625,0.25) 8(-0.625,-0.25) 9(-0.625,-0.75)
  rrect50% 0.3x0.6 smd: 5(0,1) 10(0,-1)
  silkscreen extent -0.76,-1.14 0.76,1.14, body extent -0.76,-1.14 0.76,1.14, height 3.81
BGA96_T9_P8_10_3X13_3 [mil] "BGA96_T9_P8_10_3X13_3"
  round 14 smd: A1(-126,235.75) A2(-94.5,235.75) A3(-63,235.75) A7(63,235.75) A8(94.5,235.75) A9(126,235.75) B1(-126,204.25) B2(-94.5,204.25) B3(-63,204.25) B7(63,204.25) B8(94.5,204.25) B9(126,204.25) C1(-126,172.75) C2(-94.5,172.75) C3(-63,172.75) C7(63,172.75) C8(94.5,172.75) C9(126,172.75) D1(-126,141.25) D2(-94.5,141.25) D3(-63,141.25) D7(63,141.25) D8(94.5,141.25) D9(126,141.25) E1(-126,109.75) E2(-94.5,109.75) E3(-63,109.75) E7(63,109.75) E8(94.5,109.75) E9(126,109.75) F1(-126,78.25) F2(-94.5,78.25) F3(-63,78.25) F7(63,78.25) F8(94.5,78.25) F9(126,78.25) G1(-126,46.75) G2(-94.5,46.75) G3(-63,46.75) G7(63,46.75) G8(94.5,46.75) G9(126,46.75) H1(-126,15.25) H2(-94.5,15.25) H3(-63,15.25) H7(63,15.25) H8(94.5,15.25) H9(126,15.25) J1(-126,-16.25) J2(-94.5,-16.25) J3(-63,-16.25) J7(63,-16.25) J8(94.5,-16.25) J9(126,-16.25) K1(-126,-47.75) K2(-94.5,-47.75) K3(-63,-47.75) K7(63,-47.75) K8(94.5,-47.75) K9(126,-47.75) L1(-126,-79.25) L2(-94.5,-79.25) L3(-63,-79.25) L7(63,-79.25) L8(94.5,-79.25) L9(126,-79.25) M1(-126,-110.75) M2(-94.5,-110.75) M3(-63,-110.75) M7(63,-110.75) M8(94.5,-110.75) M9(126,-110.75) N1(-126,-142.25) N2(-94.5,-142.25) N3(-63,-142.25) N7(63,-142.25) N8(94.5,-142.25) N9(126,-142.25) P1(-126,-173.75) P2(-94.5,-173.75) P3(-63,-173.75) P7(63,-173.75) P8(94.5,-173.75) P9(126,-173.75) R1(-126,-205.25) R2(-94.5,-205.25) R3(-63,-205.25) R7(63,-205.25) R8(94.5,-205.25) R9(126,-205.25) T1(-126,-236.75) T2(-94.5,-236.75) T3(-63,-236.75) T7(63,-236.75) T8(94.5,-236.75) T9(126,-236.75)
  silkscreen extent -225,-276 206,342, body extent -206,-266 206,266, height 150
BGA153_P14_P5_11P5X13 [mil] "BGA153_P14_P5_11P5X13"
  round 10 smd: A1(-127.95,127.95) A2(-108.27,127.95) A3(-88.58,127.95) A4(-68.9,127.95) A5(-49.21,127.95) A6(-29.53,127.95) A7(-9.84,127.95) A8(9.84,127.95) A9(29.53,127.95) A10(49.21,127.95) A11(68.9,127.95) A12(88.58,127.95) A13(108.27,127.95) A14(127.95,127.95) B1(-127.95,108.27) B2(-108.27,108.27) B3(-88.58,108.27) B4(-68.9,108.27) B5(-49.21,108.27) B6(-29.53,108.27) B7(-9.84,108.27) B8(9.84,108.27) B9(29.53,108.27) B10(49.21,108.27) B11(68.9,108.27) B12(88.58,108.27) B13(108.27,108.27) B14(127.95,108.27) C1(-127.95,88.58) C2(-108.27,88.58) C3(-88.58,88.58) C4(-68.9,88.58) C5(-49.21,88.58) C6(-29.53,88.58) C7(-9.84,88.58) C8(9.84,88.58) C9(29.53,88.58) C10(49.21,88.58) C11(68.9,88.58) C12(88.58,88.58) C13(108.27,88.58) C14(127.95,88.58) D1(-127.95,68.9) D2(-108.27,68.9) D3(-88.58,68.9) D4(-68.9,68.9) D12(88.58,68.9) D13(108.27,68.9) D14(127.95,68.9) E1(-127.95,49.21) E2(-108.27,49.21) E3(-88.58,49.21) E5(-49.21,49.21) E6(-29.53,49.21) E7(-9.84,49.21) E8(9.84,49.21) E9(29.53,49.21) E10(49.21,49.21) E12(88.58,49.21) E13(108.27,49.21) E14(127.95,49.21) F1(-127.95,29.53) F2(-108.27,29.53) F3(-88.58,29.53) F5(-49.21,29.53) F10(49.21,29.53) F12(88.58,29.53) F13(108.27,29.53) F14(127.95,29.53) G1(-127.95,9.84) G2(-108.27,9.84) G3(-88.58,9.84) G5(-49.21,9.84) G10(49.21,9.84) G12(88.58,9.84) G13(108.27,9.84) G14(127.95,9.84) H1(-127.95,-9.84) H2(-108.27,-9.84) H3(-88.58,-9.84) H5(-49.21,-9.84) H10(49.21,-9.84) H12(88.58,-9.84) H13(108.27,-9.84) H14(127.95,-9.84) J1(-127.95,-29.53) J2(-108.27,-29.53) J3(-88.58,-29.53) J5(-49.21,-29.53) J10(49.21,-29.53) J12(88.58,-29.53) J13(108.27,-29.53) J14(127.95,-29.53) K1(-127.95,-49.21) K2(-108.27,-49.21) K3(-88.58,-49.21) K5(-49.21,-49.21) K6(-29.53,-49.21) K7(-9.84,-49.21) K8(9.84,-49.21) K9(29.53,-49.21) K10(49.21,-49.21) K12(88.58,-49.21) K13(108.27,-49.21) K14(127.95,-49.21) L1(-127.95,-68.9) L2(-108.27,-68.9) L3(-88.58,-68.9) L12(88.58,-68.9) L13(108.27,-68.9) L14(127.95,-68.9) M1(-127.95,-88.58) M2(-108.27,-88.58) M3(-88.58,-88.58) M4(-68.9,-88.58) M5(-49.21,-88.58) M6(-29.53,-88.58) M7(-9.84,-88.58) M8(9.84,-88.58) M9(29.53,-88.58) M10(49.21,-88.58) M11(68.9,-88.58) M12(88.58,-88.58) M13(108.27,-88.58) M14(127.95,-88.58) N1(-127.95,-108.27) N2(-108.27,-108.27) N3(-88.58,-108.27) N4(-68.9,-108.27) N5(-49.21,-108.27) N6(-29.53,-108.27) N7(-9.84,-108.27) N8(9.84,-108.27) N9(29.53,-108.27) N10(49.21,-108.27) N11(68.9,-108.27) N12(88.58,-108.27) N13(108.27,-108.27) N14(127.95,-108.27) P1(-127.95,-127.95) P2(-108.27,-127.95) P3(-88.58,-127.95) P4(-68.9,-127.95) P5(-49.21,-127.95) P6(-29.53,-127.95) P7(-9.84,-127.95) P8(9.84,-127.95) P9(29.53,-127.95) P10(49.21,-127.95) P11(68.9,-127.95) P12(88.58,-127.95) P13(108.27,-127.95) P14(127.95,-127.95)
  silkscreen extent -245,-256 226,275, body extent -226,-256 226,256, height 150
BGA425_0D5_13X13MM [mil] "BGA425_0D5_13X13MM"
  round 10 smd: A1(-236.22,236.22) A2(-216.54,236.22) A3(-196.85,236.22) A4(-177.16,236.22) A5(-157.48,236.22) A6(-137.8,236.22) A7(-118.11,236.22) A8(-98.42,236.22) A9(-78.74,236.22) A10(-59.06,236.22) A11(-39.37,236.22) A12(-19.68,236.22) A13(0,236.22) A14(19.68,236.22) A15(39.37,236.22) A16(59.06,236.22) A17(78.74,236.22) A18(98.42,236.22) A19(118.11,236.22) A20(137.8,236.22) A21(157.48,236.22) A22(177.16,236.22) A23(196.85,236.22) A24(216.54,236.22) A25(236.22,236.22) AA1(-236.22,-157.48) AA2(-216.54,-157.48) AA3(-196.85,-157.48) AA5(-157.48,-157.48) AA7(-118.11,-157.48) AA8(-98.42,-157.48) AA11(-39.37,-157.48) AA12(-19.68,-157.48) AA14(19.68,-157.48) AA15(39.37,-157.48) AA18(98.42,-157.48) AA19(118.11,-157.48) AA21(157.48,-157.48) AA23(196.85,-157.48) AA24(216.54,-157.48) AA25(236.22,-157.48) AB1(-236.22,-177.16) AB2(-216.54,-177.16) AB4(-177.16,-177.16) AB6(-137.8,-177.16) AB9(-78.74,-177.16) AB10(-59.06,-177.16) AB12(-19.68,-177.16) AB14(19.68,-177.16) AB16(59.06,-177.16) AB17(78.74,-177.16) AB20(137.8,-177.16) AB22(177.16,-177.16) AB24(216.54,-177.16) AB25(236.22,-177.16) AC1(-236.22,-196.85) AC2(-216.54,-196.85) AC5(-157.48,-196.85) AC6(-137.8,-196.85) AC9(-78.74,-196.85) AC11(-39.37,-196.85) AC13(0,-196.85) AC15(39.37,-196.85) AC17(78.74,-196.85) AC20(137.8,-196.85) AC21(157.48,-196.85) AC24(216.54,-196.85) AC25(236.22,-196.85) AD1(-236.22,-216.54) AD2(-216.54,-216.54) AD3(-196.85,-216.54) AD4(-177.16,-216.54) AD5(-157.48,-216.54) AD6(-137.8,-216.54) AD7(-118.11,-216.54) AD8(-98.42,-216.54) AD9(-78.74,-216.54) AD10(-59.06,-216.54) AD11(-39.37,-216.54) AD12(-19.68,-216.54) AD13(0,-216.54) AD14(19.68,-216.54) AD15(39.37,-216.54) AD16(59.06,-216.54) AD17(78.74,-216.54) AD18(98.42,-216.54) AD19(118.11,-216.54) AD20(137.8,-216.54) AD21(157.48,-216.54) AD22(177.16,-216.54) AD23(196.85,-216.54) AD24(216.54,-216.54) AD25(236.22,-216.54) AE1(-236.22,-236.22) AE2(-216.54,-236.22) AE3(-196.85,-236.22) AE4(-177.16,-236.22) AE5(-157.48,-236.22) AE6(-137.8,-236.22) AE7(-118.11,-236.22) AE8(-98.42,-236.22) AE9(-78.74,-236.22) AE10(-59.06,-236.22) AE11(-39.37,-236.22) AE12(-19.68,-236.22) AE13(0,-236.22) AE14(19.68,-236.22) AE15(39.37,-236.22) AE16(59.06,-236.22) AE17(78.74,-236.22) AE18(98.42,-236.22) AE19(118.11,-236.22) AE20(137.8,-236.22) AE21(157.48,-236.22) AE22(177.16,-236.22) AE23(196.85,-236.22) AE24(216.54,-236.22) AE25(236.22,-236.22) B1(-236.22,216.54) B2(-216.54,216.54) B3(-196.85,216.54) B4(-177.16,216.54) B5(-157.48,216.54) B6(-137.8,216.54) B7(-118.11,216.54) B8(-98.42,216.54) B9(-78.74,216.54) B10(-59.06,216.54) B11(-39.37,216.54) B12(-19.68,216.54) B13(0,216.54) B14(19.68,216.54) B15(39.37,216.54) B16(59.06,216.54) B17(78.74,216.54) B18(98.42,216.54) B19(118.11,216.54) B20(137.8,216.54) B21(157.48,216.54) B22(177.16,216.54) B23(196.85,216.54) B24(216.54,216.54) B25(236.22,216.54) C1(-236.22,196.85) C2(-216.54,196.85) C5(-157.48,196.85) C6(-137.8,196.85) C9(-78.74,196.85) C11(-39.37,196.85) C13(0,196.85) C15(39.37,196.85) C17(78.74,196.85) C20(137.8,196.85) C21(157.48,196.85) C24(216.54,196.85) C25(236.22,196.85) D1(-236.22,177.16) D2(-216.54,177.16) D4(-177.16,177.16) D6(-137.8,177.16) D9(-78.74,177.16) D10(-59.06,177.16) D12(-19.68,177.16) D14(19.68,177.16) D16(59.06,177.16) D17(78.74,177.16) D20(137.8,177.16) D22(177.16,177.16) D24(216.54,177.16) D25(236.22,177.16) E1(-236.22,157.48) E2(-216.54,157.48) E3(-196.85,157.48) E5(-157.48,157.48) E7(-118.11,157.48) E8(-98.42,157.48) E11(-39.37,157.48) E12(-19.68,157.48) E14(19.68,157.48) E15(39.37,157.48) E18(98.42,157.48) E19(118.11,157.48) E21(157.48,157.48) E23(196.85,157.48) E24(216.54,157.48) E25(236.22,157.48) F1(-236.22,137.8) F2(-216.54,137.8) F3(-196.85,137.8) F4(-177.16,137.8) F6(-137.8,137.8) F8(-98.42,137.8) F11(-39.37,137.8) F13(0,137.8) F15(39.37,137.8) F18(98.42,137.8) F20(137.8,137.8) F22(177.16,137.8) F23(196.85,137.8) F24(216.54,137.8) F25(236.22,137.8) G1(-236.22,118.11) G2(-216.54,118.11) G5(-157.48,118.11) G7(-118.11,118.11) G9(-78.74,118.11) G10(-59.06,118.11) G12(-19.68,118.11) G13(0,118.11) G14(19.68,118.11) G16(59.06,118.11) G17(78.74,118.11) G19(118.11,118.11) G21(157.48,118.11) G24(216.54,118.11) G25(236.22,118.11) H1(-236.22,98.42) H2(-216.54,98.42) H5(-157.48,98.42) H6(-137.8,98.42) H8(-98.42,98.42) H9(-78.74,98.42) H10(-59.06,98.42) H11(-39.37,98.42) H13(0,98.42) H15(39.37,98.42) H16(59.06,98.42) H17(78.74,98.42) H18(98.42,98.42) H20(137.8,98.42) H21(157.48,98.42) H24(216.54,98.42) H25(236.22,98.42) J1(-236.22,78.74) J2(-216.54,78.74) J3(-196.85,78.74) J4(-177.16,78.74) J7(-118.11,78.74) J8(-98.42,78.74) J11(-39.37,78.74) J12(-19.68,78.74) J13(0,78.74) J14(19.68,78.74) J18(98.42,78.74) J19(118.11,78.74) J22(177.16,78.74) J23(196.85,78.74) J24(216.54,78.74) J25(236.22,78.74) K1(-236.22,59.06) K2(-216.54,59.06) K3(-196.85,59.06) K4(-177.16,59.06) K7(-118.11,59.06) K9(-78.74,59.06) K10(-59.06,59.06) K13(0,59.06) K15(39.37,59.06) K16(59.06,59.06) K17(78.74,59.06) K18(98.42,59.06) K19(118.11,59.06) K22(177.16,59.06) K24(216.54,59.06) K25(236.22,59.06) L1(-236.22,39.37) L2(-216.54,39.37) L5(-157.48,39.37) L6(-137.8,39.37) L8(-98.42,39.37) L11(-39.37,39.37) L12(-19.68,39.37) L14(19.68,39.37) L15(39.37,39.37) L18(98.42,39.37) L20(137.8,39.37) L21(157.48,39.37) L23(196.85,39.37) L24(216.54,39.37) L25(236.22,39.37) M1(-236.22,19.68) M2(-216.54,19.68) M4(-177.16,19.68) M5(-157.48,19.68) M7(-118.11,19.68) M8(-98.42,19.68) M9(-78.74,19.68) M10(-59.06,19.68) M12(-19.68,19.68) M13(0,19.68) M16(59.06,19.68) M17(78.74,19.68) M18(98.42,19.68) M19(118.11,19.68) M21(157.48,19.68) M22(177.16,19.68) M24(216.54,19.68) M25(236.22,19.68) N1(-236.22,0) N2(-216.54,0) N3(-196.85,0) N6(-137.8,0) N8(-98.42,0) N11(-39.37,0) N12(-19.68,0) N13(0,0) N14(19.68,0) N15(39.37,0) N18(98.42,0) N20(137.8,0) N23(196.85,0) N24(216.54,0) N25(236.22,0) P1(-236.22,-19.68) P2(-216.54,-19.68) P4(-177.16,-19.68) P5(-157.48,-19.68) P7(-118.11,-19.68) P9(-78.74,-19.68) P10(-59.06,-19.68) P13(0,-19.68) P16(59.06,-19.68) P17(78.74,-19.68) P18(98.42,-19.68) P19(118.11,-19.68) P21(157.48,-19.68) P22(177.16,-19.68) P24(216.54,-19.68) P25(236.22,-19.68) R1(-236.22,-39.37) R2(-216.54,-39.37) R3(-196.85,-39.37) R5(-157.48,-39.37) R6(-137.8,-39.37) R8(-98.42,-39.37) R11(-39.37,-39.37) R12(-19.68,-39.37) R13(0,-39.37) R14(19.68,-39.37) R15(39.37,-39.37) R18(98.42,-39.37) R20(137.8,-39.37) R21(157.48,-39.37) R23(196.85,-39.37) R24(216.54,-39.37) R25(236.22,-39.37) T1(-236.22,-59.06) T2(-216.54,-59.06) T4(-177.16,-59.06) T7(-118.11,-59.06) T8(-98.42,-59.06) T9(-78.74,-59.06) T10(-59.06,-59.06) T13(0,-59.06) T14(19.68,-59.06) T16(59.06,-59.06) T17(78.74,-59.06) T18(98.42,-59.06) T19(118.11,-59.06) T22(177.16,-59.06) T24(216.54,-59.06) T25(236.22,-59.06) U1(-236.22,-78.74) U2(-216.54,-78.74) U3(-196.85,-78.74) U4(-177.16,-78.74) U7(-118.11,-78.74) U8(-98.42,-78.74) U11(-39.37,-78.74) U12(-19.68,-78.74) U14(19.68,-78.74) U15(39.37,-78.74) U18(98.42,-78.74) U19(118.11,-78.74) U22(177.16,-78.74) U23(196.85,-78.74) U24(216.54,-78.74) U25(236.22,-78.74) V1(-236.22,-98.42) V2(-216.54,-98.42) V5(-157.48,-98.42) V6(-137.8,-98.42) V8(-98.42,-98.42) V9(-78.74,-98.42) V10(-59.06,-98.42) V11(-39.37,-98.42) V13(0,-98.42) V15(39.37,-98.42) V16(59.06,-98.42) V17(78.74,-98.42) V18(98.42,-98.42) V20(137.8,-98.42) V21(157.48,-98.42) V24(216.54,-98.42) V25(236.22,-98.42) W1(-236.22,-118.11) W2(-216.54,-118.11) W5(-157.48,-118.11) W7(-118.11,-118.11) W9(-78.74,-118.11) W10(-59.06,-118.11) W12(-19.68,-118.11) W13(0,-118.11) W14(19.68,-118.11) W16(59.06,-118.11) W17(78.74,-118.11) W19(118.11,-118.11) W21(157.48,-118.11) W24(216.54,-118.11) W25(236.22,-118.11) Y1(-236.22,-137.8) Y2(-216.54,-137.8) Y3(-196.85,-137.8) Y4(-177.16,-137.8) Y6(-137.8,-137.8) Y8(-98.42,-137.8) Y11(-39.37,-137.8) Y13(0,-137.8) Y15(39.37,-137.8) Y18(98.42,-137.8) Y20(137.8,-137.8) Y22(177.16,-137.8) Y23(196.85,-137.8) Y24(216.54,-137.8) Y25(236.22,-137.8)
  silkscreen extent -297,-297 297,297, body extent -255,-255 255,255, height 150
BUTTON2_3P_4D55X2D3X1D88MM [mil] "BUTTON2_3P_4D55X2D3X1D88MM"
  rrect57% 27.56x47.24 smd: 1(-66.93,-67.99) 2(66.93,-67.99)
  rrect57% 47.24x27.56 smd: S1(-82.68,38.31) S3(82.68,38.31)
  rrect16% 50x50 smd: S2(0,-64.06)
  round 35.43 hole 35.43 unplated: ""(-86.61,-5) ""(86.61,-5)
  silkscreen extent -95,-62 93,76, body extent -115,-80 115,80, height 150
C0201#1 [mil] "C0201"
  rrect50% 11x12.5 smd: 1(-11,0) 2(11,0)
  silkscreen extent -20,-10 20,10, body extent -15,-10 15,10, height 150
C0201#2 [mil] "C0201"
  rrect50% 11x12.5 smd: 1(11,0) 2(-11,0)
  silkscreen extent -20,-10 20,10, body extent -15,-10 15,10, height 150
C0201#3 [mil] "C0201"
  rrect50% 12.5x11 smd: 1(-0.01,11) 2(-0.01,-11.01)
  silkscreen extent -10,-20 10,20, body extent -15,-10 15,10, height 150
C0201#4 [mil] "C0201"
  rrect50% 12.5x11 smd: 1(0,-11) 2(0,11)
  silkscreen extent -10,-20 10,20, body extent -15,-10 15,10, height 150
C0201#5 [mil] "C0201"
  rrect36% 11x12.5 smd: 1(-11,0) 2(11,0)
  silkscreen extent -20,-10 20,10
C0402#1 [mil] "C0402"
  rrect50% 19.68x19.68 smd: 1(18.21,0) 2(-18.21,0)
  silkscreen extent -33,-16 33,16
C0402#2 [mil] "C0402"
  rrect50% 19.68x19.68 smd: 1(-18.21,0) 2(18.21,0)
  silkscreen extent -33,-16 33,16, body extent -30,-15 30,15, height 150
C0402#3 [mil] "C0402"
  rrect20% 19.68x19.68 smd: 1(-18.21,0) 2(18.21,0)
  silkscreen extent -33,-16 33,16, body extent -30,-15 30,15, height 150
C0603#1 [mil] "C0603"
  rrect50% 35x35 smd: 1(-30,0) 2(30,0)
  silkscreen extent -55,-25 55,25, body extent -55,-25 55,25, height 150
C0603#2 [mil] "C0603"
  rrect23% 35x35 smd: 1(-30,0) 2(30,0)
  silkscreen extent -55,-25 55,25, body extent -55,-25 55,25, height 150
C0805#1 [mil] "C0805"
  rrect50% 40x55 smd: 1(-35,0) 2(35,0)
  silkscreen extent -65,-35 65,35, body extent -65,-35 65,35, height 150
C0805#2 [mil] "C0805"
  rrect50% 40x55 smd: 1(35,0) 2(-35,0)
  silkscreen extent -65,-35 65,35, body extent -65,-35 65,35, height 150
C1206#1 [mil] "C1206"
  rect 55x64 smd: 1(55.5,0) 2(-55.5,0)
  silkscreen extent -95,-40 95,40, body extent -95,-40 95,40, height 150
C1206#2 [mil] "C1206"
  rect 55x64 smd: 1(-55.5,0) 2(55.5,0)
  silkscreen extent -95,-40 95,40, body extent -95,-40 95,40, height 150
CONNECT10_1D27_12_4X6_7MM [mm] "CONNECT10_1D27_12_4X6_7MM"
  round 0.89 smd: 1(-2.54,-0.572) 2(-1.27,-0.572) 3(0,-0.572) 4(1.27,-0.572) 5(2.54,-0.572) 6(2.54,0.699) 7(1.27,0.699) 8(0,0.699) 9(-1.27,0.699) 10(-2.54,0.699)
  round 1.2 hole 1.2 unplated: ""(-3.81,0.064) ""(3.81,-0.951) ""(3.81,1.078)
  Multi-Layer keep-out region: 4.556,-0.951 4.531,-0.758 4.456,-0.578 4.338,-0.424 4.183,-0.305 4.003,-0.231 3.81,-0.205 3.617,-0.231 3.437,-0.305 3.437,-0.305 3.282,-0.424 3.164,-0.578 3.089,-0.758 3.064,-0.951 3.089,-1.145 3.164,-1.325 3.282,-1.479 3.437,-1.598 3.437,-1.598 3.617,-1.672 3.81,-1.698 4.003,-1.672 4.183,-1.598 4.338,-1.479 4.456,-1.325 4.531,-1.145 4.556,-0.951
  Multi-Layer keep-out region: 4.558,1.078 4.532,1.272 4.458,1.452 4.339,1.607 4.184,1.726 4.004,1.801 3.81,1.826 3.616,1.801 3.436,1.726 3.436,1.726 3.281,1.607 3.162,1.452 3.088,1.272 3.062,1.078 3.088,0.885 3.162,0.705 3.281,0.55 3.436,0.431 3.436,0.431 3.616,0.356 3.81,0.331 4.004,0.356 4.184,0.431 4.339,0.55 4.458,0.705 4.532,0.885 4.558,1.078
  Multi-Layer keep-out region: -3.041,0.064 -3.068,0.262 -3.144,0.448 -3.267,0.607 -3.426,0.729 -3.611,0.806 -3.81,0.832 -4.009,0.806 -4.194,0.729 -4.194,0.729 -4.353,0.607 -4.476,0.448 -4.552,0.262 -4.579,0.064 -4.552,-0.135 -4.476,-0.321 -4.353,-0.48 -4.194,-0.602 -4.194,-0.602 -4.009,-0.679 -3.81,-0.705 -3.611,-0.679 -3.426,-0.602 -3.267,-0.48 -3.144,-0.321 -3.068,-0.135 -3.041,0.064
D0402#1 [mil] "D0402"
  rrect20% 19.68x19.68 smd: 1(-18.21,0) 2(18.21,0)
  silkscreen extent -33,-16 33,16, body extent -30,-15 30,15, height 150
D0402#2 [mil] "D0402"
  rrect50% 19.68x19.68 smd: 1(-18.21,0) 2(18.21,0)
  silkscreen extent -33,-16 33,16, body extent -30,-15 30,15, height 150
DO_214AC_SMA [mil] "DO_214AC_SMA"
  rrect23% 69.68x70.86 smd: 1(-80.39,0) 2(80.39,0)
  silkscreen extent -84,-53 84,53, body extent -85,-55 85,55, height 150
E-13_4X13_3-N100_0_75-TOP [mm] "E-13_4X13_3-N100_0_75-TOP"
  rect 0.75x0.75 smd: 1(-6.025,-5.975) 17(6.025,-5.975) 33(6.025,5.975) 49(-6.025,5.975)
  rect 0.4x0.75 smd: 2(-4.9,-5.975) 3(-4.2,-5.975) 4(-3.5,-5.975) 5(-2.8,-5.975) 6(-2.1,-5.975) 7(-1.4,-5.975) 8(-0.7,-5.975) 9(0,-5.975) 10(0.7,-5.975) 11(1.4,-5.975) 12(2.1,-5.975) 13(2.8,-5.975) 14(3.5,-5.975) 15(4.2,-5.975) 16(4.9,-5.975) 34(4.9,5.975) 35(4.2,5.975) 36(3.5,5.975) 37(2.8,5.975) 38(2.1,5.975) 39(1.4,5.975) 40(0.7,5.975) 41(0,5.975) 42(-0.7,5.975) 43(-1.4,5.975) 44(-2.1,5.975) 45(-2.8,5.975) 46(-3.5,5.975) 47(-4.2,5.975) 48(-4.9,5.975)
  rect 0.75x0.4 smd: 18(6.025,-4.9) 19(6.025,-4.2) 20(6.025,-3.5) 21(6.025,-2.8) 22(6.025,-2.1) 23(6.025,-1.4) 24(6.025,-0.7) 25(6.025,0) 26(6.025,0.7) 27(6.025,1.4) 28(6.025,2.1) 29(6.025,2.8) 30(6.025,3.5) 31(6.025,4.2) 32(6.025,4.9) 50(-6.025,4.9) 51(-6.025,4.2) 52(-6.025,3.5) 53(-6.025,2.8) 54(-6.025,2.1) 55(-6.025,1.4) 56(-6.025,0.7) 57(-6.025,0) 58(-6.025,-0.7) 59(-6.025,-1.4) 60(-6.025,-2.1) 61(-6.025,-2.8) 62(-6.025,-3.5) 63(-6.025,-4.2) 64(-6.025,-4.9)
  rect 1x1 smd: G1(-3.85,-3.85) G2(-2.45,-3.85) G3(-1.05,-3.85) G4(-3.85,-2.45) G5(-2.45,-2.45) G6(-1.05,-2.45) G7(-3.85,-1.05) G8(-2.45,-1.05) G9(-1.05,-1.05) G10(1.05,-3.85) G11(2.45,-3.85) G12(3.85,-3.85) G13(1.05,-2.45) G14(2.45,-2.45) G15(3.85,-2.45) G16(1.05,-1.05) G17(2.45,-1.05) G18(3.85,-1.05) G19(-3.85,1.05) G20(-2.45,1.05) G21(-1.05,1.05) G22(-3.85,2.45) G23(-2.45,2.45) G24(-1.05,2.45) G25(-3.85,3.85) G26(-2.45,3.85) G27(-1.05,3.85) G28(1.05,1.05) G29(2.45,1.05) G30(3.85,1.05) G31(1.05,2.45) G32(2.45,2.45) G33(3.85,2.45) G34(1.05,3.85) G35(2.45,3.85) G36(3.85,3.85)
  silkscreen extent -6.65,-7.24 6.65,6.65, body extent -6.43,-6.38 6.43,6.38, height 3.81
F0603 [mil] "F0603"
  rrect50% 39.36x39.36 smd: 1(-31.5,0) 2(31.5,0)
  silkscreen extent -11,-21 11,21, body extent -40,-20 40,20, height 150
FPC22_0D5_15_4X5_25X2MM_0D5_DX_NPWB [mil] "FPC22_0D5_15_4X5_25X2MM_0D5_DX_NPWB"
  rrect33% 11.8x51.18 smd: 1(206.69,116.81) 2(187.01,116.81) 3(167.32,116.81) 4(147.64,116.81) 5(127.95,116.81) 6(108.27,116.81) 7(88.58,116.81) 8(68.9,116.81) 9(49.21,116.81) 10(29.53,116.81) 11(9.84,116.81) 12(-9.84,116.81) 13(-29.53,116.81) 14(-49.21,116.81) 15(-68.9,116.81) 16(-88.58,116.81) 17(-108.27,116.81) 18(-127.95,116.81) 19(-147.64,116.81) 20(-167.32,116.81) 21(-187.01,116.81) 22(-206.69,116.81)
  rect 70.87x86.61 smd: 23(-287.4,-7.1) 24(287.4,-7.09)
  silkscreen extent -303,-102 303,165, body extent -305,-105 305,105, height 150
FPC40_0D5_25_4X5_25X2MM [mil] "FPC40_0D5_25_4X5_25X2MM"
  rrect33% 11.8x51.18 smd: 1(-383.86,114.31) 2(-364.17,114.31) 3(-344.49,114.31) 4(-324.8,114.31) 5(-305.12,114.31) 6(-285.43,114.31) 7(-265.75,114.31) 8(-246.06,114.31) 9(-226.38,114.31) 10(-206.69,114.31) 11(-187.01,114.31) 12(-167.32,114.31) 13(-147.64,114.31) 14(-127.95,114.31) 15(-108.27,114.31) 16(-88.58,114.31) 17(-68.9,114.31) 18(-49.21,114.31) 19(-29.53,114.31) 20(-9.84,114.31) 21(9.84,114.31) 22(29.53,114.31) 23(49.21,114.31) 24(68.9,114.31) 25(88.58,114.31) 26(108.27,114.31) 27(127.95,114.31) 28(147.64,114.31) 29(167.32,114.31) 30(187.01,114.31) 31(206.69,114.31) 32(226.38,114.31) 33(246.06,114.31) 34(265.75,114.31) 35(285.43,114.31) 36(305.12,114.31) 37(324.8,114.31) 38(344.49,114.31) 39(364.17,114.31) 40(383.86,114.31)
  rect 90.55x125.98 smd: 41(-468.5,45.41) 42(468.5,45.41)
  silkscreen extent -500,-104 500,157, body extent -500,-103 500,103, height 150